# Altium PCB ESS-BoB.PcbDoc
Units mm, origin at the board's own origin, x right, y up, seen from the top; angles counter-clockwise.
Board outline 168.28 x 69.85 mm, 4 copper layers (Top, GND, PWR, Bottom), stack 1.584 mm thick; 101 components, 116 nets, 352 pads, 102 vias.
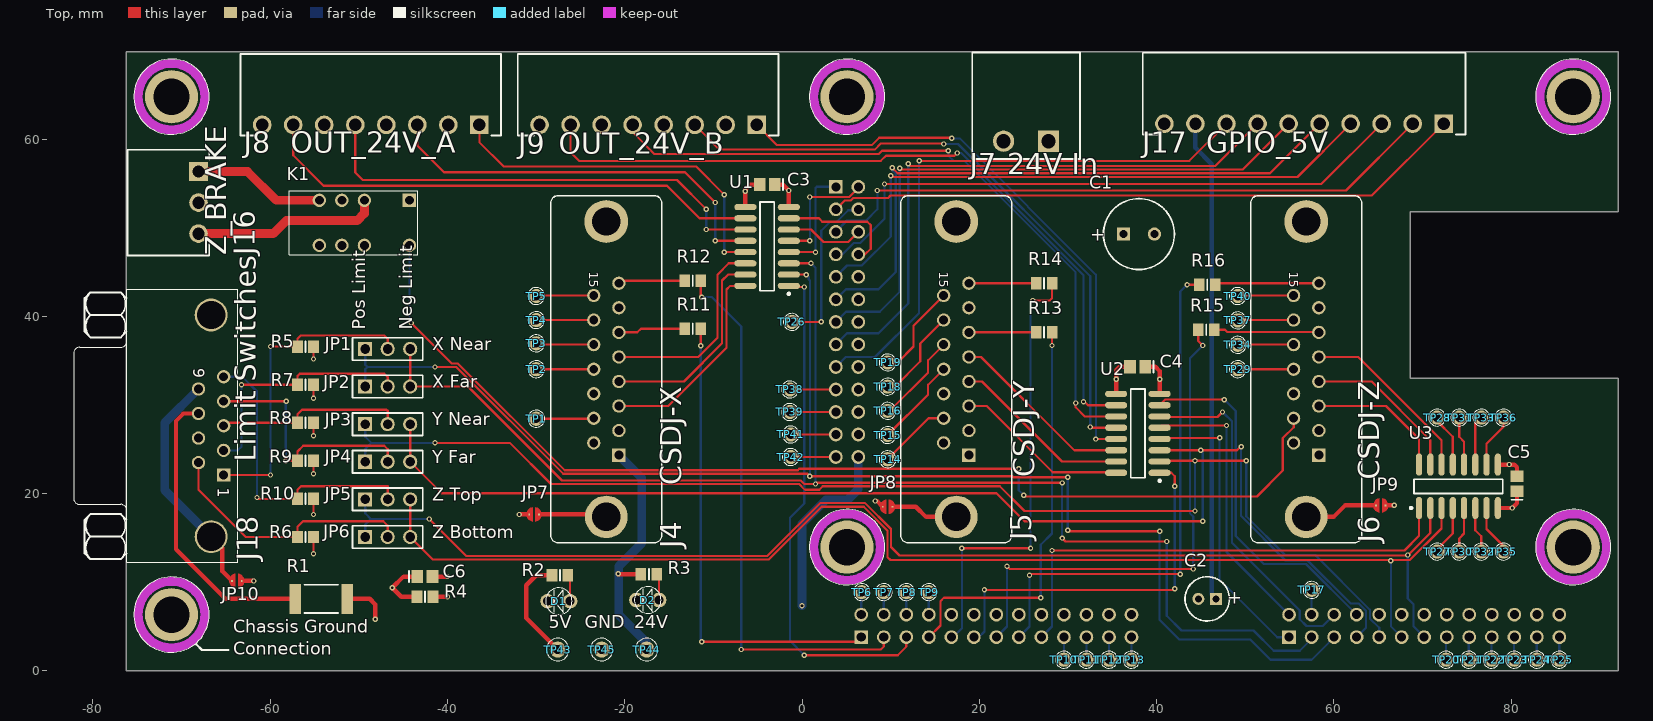
[diagram p0: Top view]
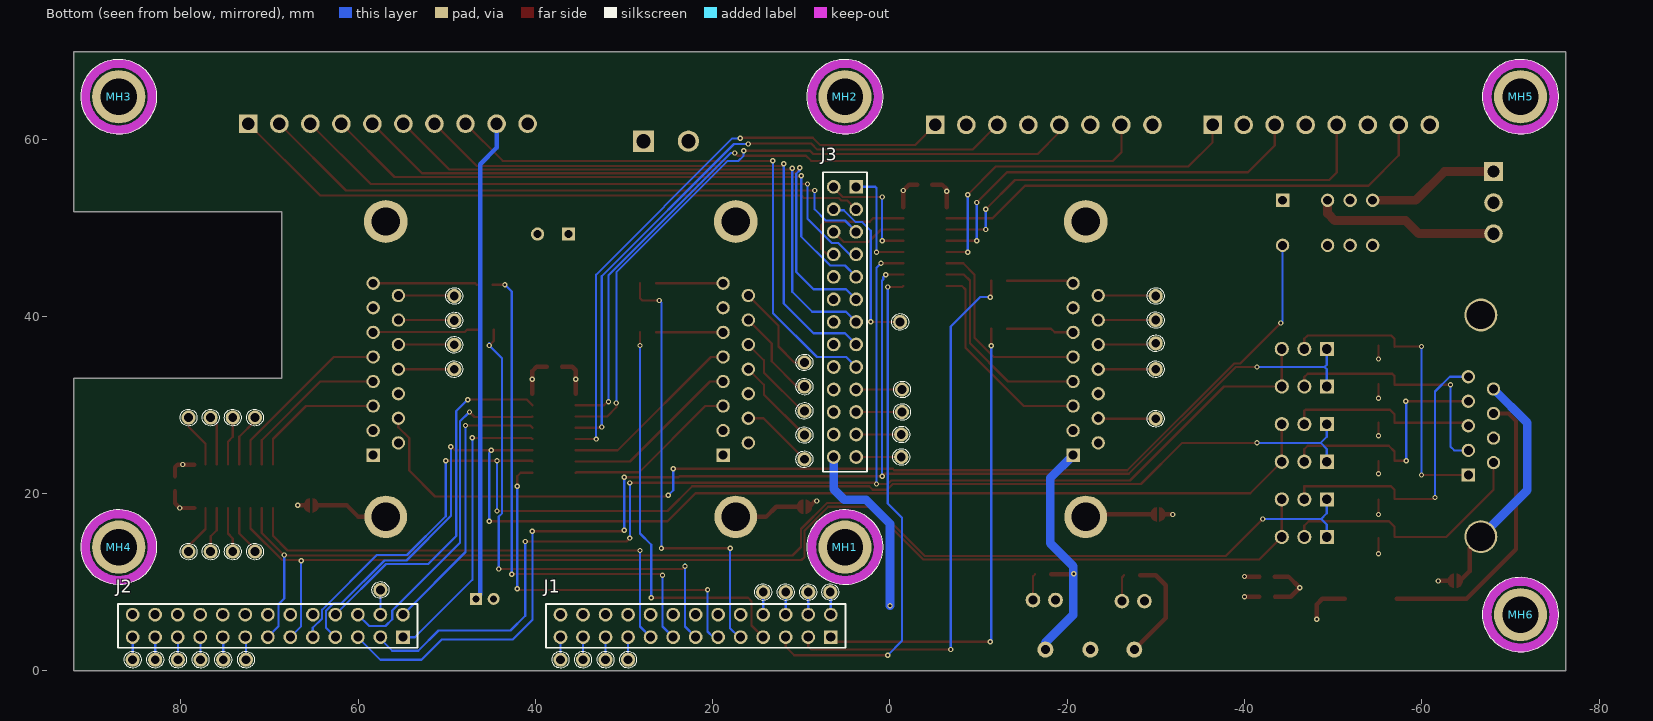
[diagram p1: Bottom view, seen from below]
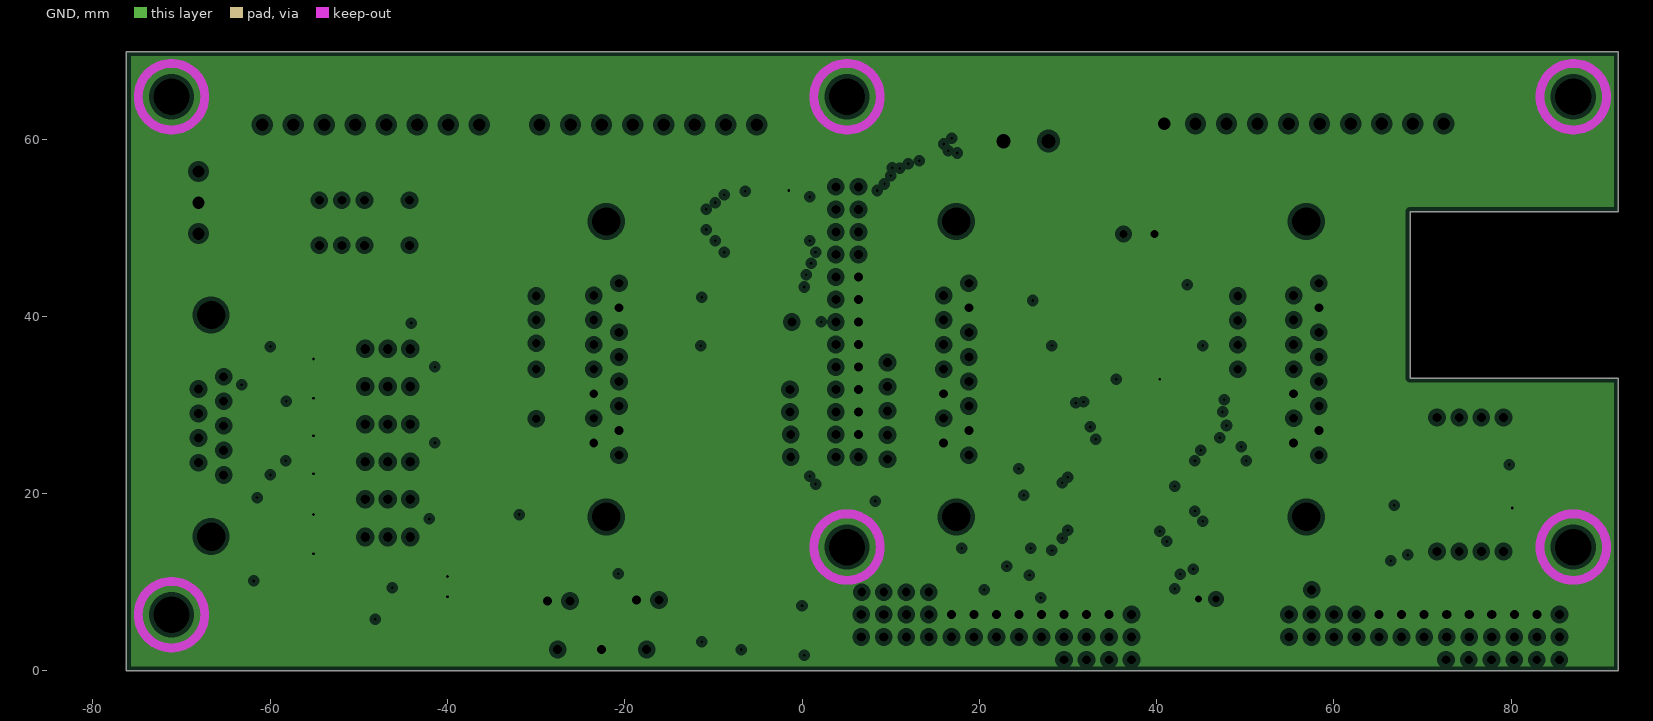
[diagram p2: GND, clearances drawn from the general rule]
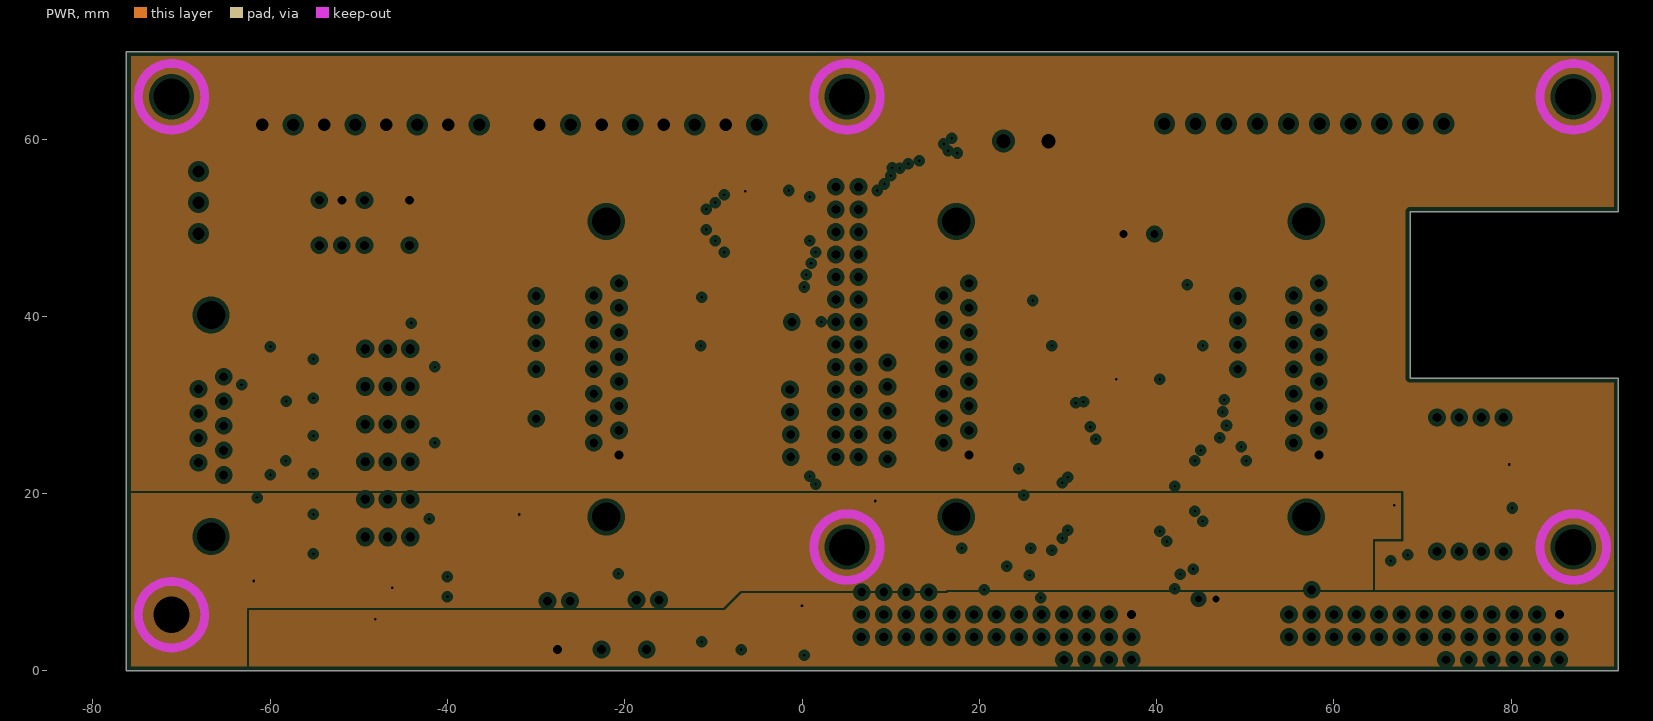
[diagram p3: PWR, clearances drawn from the general rule]
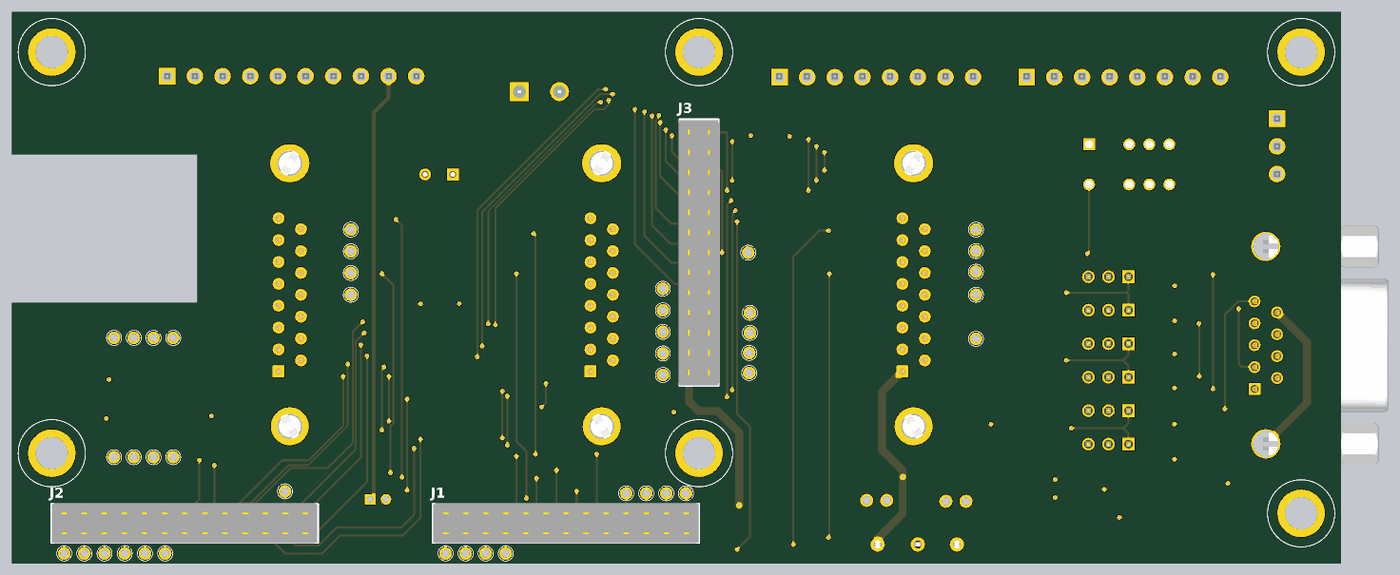
[diagram p4: 3D render of the assembled board from below, using the file's embedded part models]

## Layer stack, top to bottom
Top Solder: solder mask 0.01, Solder Resist, Dk 3.5
Top: signal copper 0.035
Prepreg: prepreg 0.18, Dk 4.2
GND: plane copper 0.017, net GND
Core: core 1.12, FR-4, Dk 4.2
PWR: plane copper 0.017, net 24V
Prepreg: prepreg 0.18, Dk 4.2
Bottom: signal copper 0.035
Solder Side: solder mask 0.01, Solder Resist, Dk 3.5

## Board outline
92.075,33.02 68.58,33.02 68.58,51.816 92.075,51.816 92.075,69.85 -76.2,69.85 -76.2,0 92.075,0

## Design rules (kind name [scope] priority, off if disabled: settings)
BoardOutlineClearance [not OnTopSilkscreen and not OnBottomSilkscreen] p1: gap=0.2 ignorepadtopadclearanceinfootprint=FALSE except(0: Arc-SplitContinuation Track-SplitContinuation SMDPad-SplitContinuation THPad-SplitContinuation Via-SplitContinuation Fill-SplitContinuation Poly-SplitContinuation Region-SplitContinuation Text-SplitContinuation)
Clearance Clearance_HV [InNetClass('HV_NETS')] p1: gap=0.4 ignorepadtopadclearanceinfootprint=TRUE
Clearance Clearance_Mounting_Hole_Chassis_GND [InComponent('MH6') vs InNet('CHASSIS_GND')] p2: gap=0 ignorepadtopadclearanceinfootprint=TRUE
Clearance "Stitching Via clearance" [IsStitchingVia vs (IsVia and (Not IsStitchingVia)) Or InAnyComponent] p3: gap=0.2 ignorepadtopadclearanceinfootprint=FALSE except(0: Arc-Hole Track-Hole SMDPad-Hole THPad-Hole Via-Hole Fill-Hole Poly-Hole Region-Hole Text-Hole)
Clearance [All] p4: gap=0.15 ignorepadtopadclearanceinfootprint=FALSE except(0: Arc-Hole Track-Hole SMDPad-Hole THPad-Hole Via-Hole Fill-Hole Poly-Hole Region-Hole Text-Hole; 0.2: Arc-Poly Track-Poly SMDPad-Poly THPad-Poly Via-Poly Fill-Poly Poly-Poly)
ComponentClearance ComponentClearance_NetTie [((ObjectKind = 'Component') And (ComponentType = 'Net Tie')) Or (Footprint = 'StarPoint') Or (Footprint like 'NetTieVia*')] p1: gap=-3.81 collisioncheckmode=3 verticalgap=-3.81 showdistances=FALSE
ComponentClearance [All] p2: gap=0.25 collisioncheckmode=3 verticalgap=0.254 showdistances=FALSE
DiffPairsRouting [All] p1: maxlimit=1 minlimit=0.15 mostfreqgap=0.25 toplayer_minwidth=0.15 toplayer_maxwidth=1 toplayer_prefwidth=0.2 bottomlayer_minwidth=0.15 bottomlayer_maxwidth=1 bottomlayer_prefwidth=0.2 maxuncoupledlength=20
FanoutControl Fanout_LCC [IsLCC] p2: bgadir=Out bgaviamode=Closest fanoutstyle=Rows fanoutdirection=OutOnly viagrid=0.025 // Fanout_LCC (Default Rule)
HoleSize [All] p1: absolutevalues=TRUE maxlimit=6 minlimit=0.3 maxpercent=80.000 minpercent=20.000
HoleToHoleClearance [All] p1: gap=0.2 allowstackedmicrovias=TRUE
PlaneClearance [All] p1: clearance=0.5
PlaneConnect PlaneConnect_stiching_vias [IsStitchingVia] p1: planeconnectstyle=Direct reliefexpansion=0.508 reliefentries=4 reliefconductorwidth=0.254 reliefairgap=0.254
PlaneConnect PlaneConnect_others [All] p2: planeconnectstyle=Direct reliefexpansion=0.508 reliefentries=4 reliefconductorwidth=0.254 reliefairgap=0.254
PolygonConnect [All] p1: connectstyle=Direct reliefconductorwidth=0.254 reliefentries=4 polygonreliefangle="90 Angle" airgapwidth=0.254
RoutingCorners [All] p1: cornerstyle=45-Degree minsetback=2.5 maxsetback=2.5
RoutingVias [All] p1: holewidth=0.3 width=0.6 viastyle="Through Hole" minholewidth=0.3 minwidth=0.6 maxholewidth=0.6 maxwidth=1.2
SilkToSolderMaskClearance [IsPad] p1: minsilkscreentomaskgap=0 clearancetoexposedcopper=TRUE
SolderMaskExpansion [All] p1: expansion=0.1
Width [All] p1: maxlimit=20 minlimit=0.2 preferedwidth=0.25
21 further rules are at their usual default settings.

## Classes and differential pairs
component class ESS-BoB: C1 C2 C3 C4 C5 C6 D1 D2 J1 J2 J3 J4 J5 J6 J7 J8 J9 J16 J17 J18 JP1 JP2 JP3 JP4 JP5 JP6 JP7 JP8 JP9 JP10 K1 R1 R2 R3 R4 R5 R6 R7 R8 R9 R10 R11 R12 R13 R14 R15 R16 TP1 TP2 TP3 TP4 TP5 TP6 TP7 TP8 TP9 TP10 TP11 TP12 TP13 TP14 TP15 TP16 TP17 TP18 TP19 TP20 TP21 TP22 TP23 TP24 TP25 TP26 TP27 TP28 TP29 TP30 TP31 TP32 TP33 TP34 TP35 TP36 TP37 TP38 TP39 TP40 TP41 TP42 TP43 TP44 TP45 U1 U2 U3

## Components (designator, comment, footprint, x,y, rotation, side; value= is the part's Value field where it differs from the comment)
C1 "Cap Polarized" CAPPR3.5-8x12 38.001,49.276 r0 top value=100uF
C2 "Cap Polarized" CAPPR2-5x11 45.704,8.128 r180 top value=100uF
C3 "Cap non-polarized" CAPC2012N -3.937,54.864 r180 top value=0.1uF
C4 "Cap non-polarized" CAPC2012N 37.846,34.302 r180 top value=0.1uF
C5 "Cap non-polarized" CAPC2012N 80.645,21.121 r90 top value=0.1uF
C6 "Cap non-polarized" CAPC2012N -42.53,10.648 r0 top value=10nF
D1 "5V" LED-3MM-RED -26.162,7.874 r180 top
D2 "24V" LED-3MM-RED -16.129,8.001 r180 top
J1 "ESS Header 1" "Samtec ESQ-113-33-G-D" 21.92,5.08 r0 bottom locked
J2 "ESS Header 2" "Samtec ESQ-113-33-G-D" 70.18,5.08 r0 bottom locked
J3 "ESS Header 3" "Samtec ESQ-113-33-G-D" 5.08,39.37 r270 bottom locked
J4 "CSDJ-X" "D-SUB-15 FEMALE TH STRAIGHT" -22.075,34.036 r270 top
J5 "CSDJ-Y" "D-SUB-15 FEMALE TH STRAIGHT" 17.399,34.036 r270 top
J6 "CSDJ-Z" "D-SUB-15 FEMALE TH STRAIGHT" 56.873,34.036 r270 top
J7 "24V In" "Modular Screw Terminals 5.08mm 2p RA TH" 25.273,63.754 r180 top
J8 "OUT_24V_A" "Modular Screw Terminals 3.5mm 8p RA TH MOLEX" -48.641,64.995 r180 top
J9 "OUT_24V_B" "Modular Screw Terminals 3.5mm 8p RA TH MOLEX" -17.356,64.995 r180 top
J16 "Z_BRAKE" "Modular Screw Terminals 3.5mm 3p RA TH MOLEX" -68.072,52.832 r270 top
J17 "GPIO_5V" "Modular Screw Terminals 3.5mm 10p RA TH MOLEX" 56.629,61.722 r180 top
J18 "Limit Switches" "D-SUB-9 FEMALE TH RA" -66.652,27.65 r270 top
JP1 "X Near" "Header 2.54mm 3p TH Vertical" -46.736,36.322 r0 top
JP2 "X Far" "Header 2.54mm 3p TH Vertical" -46.736,32.08 r0 top
JP3 "Y Near" "Header 2.54mm 3p TH Vertical" -46.736,27.838 r0 top
JP4 "Y Far" "Header 2.54mm 3p TH Vertical" -46.736,23.597 r0 top
JP5 "Z Top" "Header 2.54mm 3p TH Vertical" -46.736,19.355 r0 top
JP6 "Z Bottom" "Header 2.54mm 3p TH Vertical" -46.736,15.113 r0 top
JP7 "Solder Jumper NO" "SOLDER JUMPER NO 1.6mm" -30.226,17.653 r270 top
JP8 "Solder Jumper NO" "SOLDER JUMPER NO 1.6mm" 9.652,18.528 r270 top
JP9 "Solder Jumper NO" "SOLDER JUMPER NO 1.6mm" 65.278,18.669 r90 top
JP10 "Solder Jumper NO" "SOLDER JUMPER NO 1.6mm" -63.754,10.16 r270 top
K1 "V23079A1001B301 _1393788-3_" TE_RELAY_V23079_TH -44.281,53.086 r180 top
MH1 "Mounting Hole, 4.0mm" "HOLE M4" 5.08,13.97 r180 bottom locked
MH2 "Mounting Hole, 4.0mm" "HOLE M4" 5.08,64.77 r180 bottom locked
MH3 "Mounting Hole, 4.0mm" "HOLE M4" 86.995,64.77 r180 bottom locked
MH4 "Mounting Hole, 4.0mm" "HOLE M4" 86.995,13.97 r180 bottom locked
MH5 "Mounting Hole, 4.0mm" "HOLE M4" -71.12,64.77 r180 bottom
MH6 "Mounting Hole, 4.0mm" "HOLE M4" -71.12,6.35 r180 bottom
R1 "Resistor" RESC6332N -54.229,8.128 r0 top value=47
R2 "Resistor" RESC2012N -27.305,10.795 r180 top value=680
R3 "Resistor" RESC2012N -17.272,10.922 r180 top value=4.7k
R4 "Resistor" RESC2012N -42.53,8.362 r180 top value=1M
R5 "Resistor" RESC2012N -56.007,36.576 r180 top value=4.7k
R6 "Resistor" RESC2012N -56.007,15.113 r180 top value=4.7k
R7 "Resistor" RESC2012N -56.007,32.283 r180 top value=4.7k
R8 "Resistor" RESC2012N -56.007,27.991 r180 top value=4.7k
R9 "Resistor" RESC2012N -56.007,23.698 r180 top value=4.7k
R10 "Resistor" RESC2012N -56.007,19.406 r180 top value=4.7k
R11 "Resistor" RESC2012N -12.319,38.608 r180 top value=220
R12 "Resistor" RESC2012N -12.319,44 r180 top value=220
R13 "Resistor" RESC2012N 27.305,38.191 r180 top value=220
R14 "Resistor" RESC2012N 27.305,43.731 r180 top value=220
R15 "Resistor" RESC2012N 45.593,38.481 r0 top value=220
R16 "Resistor" RESC2012N 45.72,43.561 r0 top value=220
TP1 "" "TEST PAD TH" -29.972,28.448 r180 top
TP2 "" "TEST PAD TH" -29.972,34.036 r180 top
TP3 "" "TEST PAD TH" -29.972,36.957 r180 top
TP4 "" "TEST PAD TH" -29.972,39.576 r180 top
TP5 "" "TEST PAD TH" -29.972,42.291 r180 top
TP6 "" "TEST PAD TH" 6.731,8.89 r180 top
TP7 "" "TEST PAD TH" 9.22,8.89 r180 top
TP8 "" "TEST PAD TH" 11.76,8.89 r180 top
TP9 "" "TEST PAD TH" 14.3,8.89 r180 top
TP10 "" "TEST PAD TH" 29.54,1.27 r0 top
TP11 "" "TEST PAD TH" 32.08,1.27 r0 top
TP12 "" "TEST PAD TH" 34.62,1.27 r0 top
TP13 "" "TEST PAD TH" 37.16,1.27 r0 top
TP14 "" "TEST PAD TH" 9.652,23.876 r180 top
TP15 "" "TEST PAD TH" 9.652,26.607 r180 top
TP16 "" "TEST PAD TH" 9.652,29.337 r180 top
TP17 "" "TEST PAD TH" 57.48,9.144 r180 top
TP18 "" "TEST PAD TH" 9.652,32.067 r180 top
TP19 "" "TEST PAD TH" 9.652,34.798 r180 top
TP20 "" "TEST PAD TH" 72.644,1.27 r0 top
TP21 "" "TEST PAD TH" 75.203,1.27 r0 top
TP22 "" "TEST PAD TH" 77.762,1.27 r0 top
TP23 "" "TEST PAD TH" 80.321,1.27 r0 top
TP24 "" "TEST PAD TH" 82.88,1.27 r180 top
TP25 "" "TEST PAD TH" 85.42,1.27 r180 top
TP26 "" "TEST PAD TH" -1.143,39.37 r180 top
TP27 "" "TEST PAD TH" 71.628,13.462 r180 top
TP28 "" "TEST PAD TH" 71.628,28.575 r180 top
TP29 "" "TEST PAD TH" 49.149,34.036 r180 top
TP30 "" "TEST PAD TH" 74.126,13.462 r180 top
TP31 "" "TEST PAD TH" 74.126,28.575 r180 top
TP32 "" "TEST PAD TH" 76.623,13.462 r180 top
TP33 "" "TEST PAD TH" 76.623,28.575 r180 top
TP34 "" "TEST PAD TH" 49.149,36.788 r180 top
TP35 "" "TEST PAD TH" 79.121,13.462 r180 top
TP36 "" "TEST PAD TH" 79.121,28.575 r180 top
TP37 "" "TEST PAD TH" 49.149,39.539 r180 top
TP38 "" "TEST PAD TH" -1.36,31.75 r180 top
TP39 "" "TEST PAD TH" -1.36,29.21 r180 top
TP40 "" "TEST PAD TH" 49.149,42.291 r180 top
TP41 "" "TEST PAD TH" -1.27,26.67 r180 top
TP42 "" "TEST PAD TH" -1.27,24.13 r180 top
TP43 "5V" "TP_LOOP_1MM - WHITE" -27.559,2.413 r180 top
TP44 "24V" "TP_LOOP_1MM - WHITE" -17.526,2.413 r180 top
TP45 "GND" "TP_LOOP_1MM - BLACK" -22.606,2.413 r180 top
U1 "TPL7407LA" "TI D016_M (SOIC16)" -3.937,47.879 r180 top
U2 "TPL7407LA" "TI D016_M (SOIC16)" 37.883,26.797 r180 top
U3 "TPL7407LA" "TI D016_M (SOIC16)" 74.041,20.828 r90 top

## Footprints (in the part's own frame and the unit in brackets; to place one, negate y for a bottom-side part, rotate by r counter-clockwise, add the part's x,y. Pads: shape width x height; smd on the part's side, far side on the other; paste and mask are expansions set on the pad)
CAPC2012N [mm] "Chip Capacitor, Body 2.0x1.3mm, IPC Medium Density"
  rect 1.3x1.5 smd: 1(-0.85,0) 2(0.85,0)
  silkscreen extent -1.8,-0.65 -1.8,0.65, body extent -1.1,-0.72 1.1,0.72, height 1.1
CAPPR2-5x11 [mm] "Capacitor, Electrolytic, Radial; Body 5 x 11 mm (Dia.xH typ); Pin Spacing 2 mm (typ)"
  rect 1.35x1.35 hole 0.8: 1(-1,0)
  round 1.35 hole 0.8: 2(1,0)
  silkscreen extent -2.5,-2.5 2.5,2.5, body extent -2.5,-2.5 2.5,2.5, height 11
CAPPR3.5-8x12 [mm] "Capacitor, Electrolytic, Radial; Body 8 x 12 mm (Dia.xH typ); Pin Spacing 3.5 mm (typ)"
  rect 1.5x1.5 hole 0.9: 1(-1.75,0)
  round 1.5 hole 0.9: 2(1.75,0)
  silkscreen extent -4,-4 4,4, body extent -4,-4 4,4, height 12
"D-SUB-9 FEMALE TH RA" [mm] "Wurth 618009231121 - 9 pins, right angled, 8.08mm, with hex screw"
  rect 1.5x1.5 hole 1: 1(5.54,1.42)
  round 1.5 hole 1: 2(2.77,1.42) 3(0,1.42) 4(-2.77,1.42) 5(-5.54,1.42) 6(4.155,-1.42) 7(1.385,-1.42) 8(-1.385,-1.42) 9(-4.155,-1.42)
  round 3.7 hole 3.2: Z1(-12.5,0) Z2(12.5,0)
  silkscreen extent -15.4,-15.5 15.4,3, body extent -15.4,-15.5 15.4,3, height 12.51
"D-SUB-15 FEMALE TH STRAIGHT" [mm] "Wurth 61801529321 - Female 15p Straight With board clip & Hex screw UNC 4-40"
  rect 1.5x1.5 hole 1: 1(9.695,1.42)
  round 1.5 hole 1: 2(6.925,1.42) 3(4.155,1.42) 4(1.385,1.42) 5(-1.385,1.42) 6(-4.155,1.42) 7(-6.925,1.42) 8(-9.695,1.42) 9(8.31,-1.42) 10(5.54,-1.42) 11(2.77,-1.42) 12(0,-1.42) 13(-2.77,-1.42) 14(-5.54,-1.42) 15(-8.31,-1.42)
  oval 4.8x4.95 hole 3.2: M1(-16.66,0)
  round 4.8 hole 3.2: M2(16.66,0)
  silkscreen extent -19.57,-6.25 19.57,6.25, body extent -19.57,-6.25 19.57,6.25, height 12.9
"Header 2.54mm 3p TH Vertical" [mm] "Pin Header, pitch 2.54 mm, THT, Vertical, single row, 3p"
  rect 1.6x1.6 hole 1.1: 1(-2.54,0)
  round 1.6 hole 1.1: 2(0,0) 3(2.54,0)
  silkscreen extent -3.96,-1.27 3.96,1.27, body extent -3.81,-1.27 3.81,1.27, height 8.57
"HOLE M4" [mm] "M4 mounting hole, 8.5mm keepout"
  round 6 hole 4.1: 1(0,0)
  Keep-Out Layer circle w1: c0,0 r3.75
  silkscreen extent -4.25,-4.25 4.25,4.25
LED-3MM-RED [mil]
  round 65 hole 40: A(0,0) K(100,0)
  silkscreen extent -9,-59 109,59, body extent -15,-63 114,67, height 250
"Modular Screw Terminals 3.5mm 3p RA TH MOLEX" [mm] "Horizontal PCB Header, pitch 3.5mm, 3p"
  rect 2.1x2.1 hole 1.4: 1(-3.5,0)
  round 2.1 hole 1.4: 2(0,0) 3(3.5,0)
  silkscreen extent -5.95,-8 5.97,1.2, body extent -5.96,-7.87 5.96,1.27, height 6.86
"Modular Screw Terminals 3.5mm 8p RA TH MOLEX" [mm] "Horizontal PCB Header, pitch 3.5mm, 08p"
  rect 2.1x2.1 hole 1.4: 1(-12.25,3.4)
  round 2.1 hole 1.4: 2(-8.75,3.4) 3(-5.25,3.4) 4(-1.75,3.4) 5(1.75,3.4) 6(5.25,3.4) 7(8.75,3.4) 8(12.25,3.4)
  silkscreen extent -14.7,-4.6 14.7,4.6, body extent -14.69,-4.57 14.69,4.57, height 6.86
"Modular Screw Terminals 3.5mm 10p RA TH MOLEX" [mm] "Horizontal PCB Header, pitch 3.5mm, 10p"
  rect 2.1x2.1 hole 1.4: 1(-15.75,0)
  round 2.1 hole 1.4: 2(-12.25,0) 3(-8.75,0) 4(-5.25,0) 5(-1.75,0) 6(1.75,0) 7(5.25,0) 8(8.75,0) 9(12.25,0) 10(15.75,0)
  silkscreen extent -18.2,-8 18.2,1.2, body extent -18.23,-7.88 18.25,1.27, height 6.86
"Modular Screw Terminals 5.08mm 2p RA TH" [mm] "Wurth 691313510002 - 5,08mm - PCB Headers - Horizontal - Closed ends - 02p"
  rect 2.4x2.4 hole 1.6: 1(-2.54,4)
  round 2.4 hole 1.6: 2(2.54,4)
  silkscreen extent -6.08,-6 6.08,6, body extent -6.08,-6 6.08,6, height 8.55
RESC2012N [mm] "Chip Resistor, Body 2.0x1.3mm, IPC Medium Density"
  rect 1.2x1.4 smd: 1(-0.9,0) 2(0.9,0)
  silkscreen extent 0,-0.6 0,0.6, body extent -1.07,-0.7 1.07,0.7, height 0.65
RESC6332N [mm] "Chip Resistor, Body 6.3x3.2mm, IPC Medium Density"
  rect 1.3x3.4 smd: 1(-2.95,0) 2(2.95,0)
  silkscreen extent -1.9,-1.6 1.9,1.6, body extent -3.22,-1.68 3.22,1.68, height 0.71
"Samtec ESQ-113-33-G-D" [mm] "Samtec female header, 2x13pin, extra tall"
  rect 1.55x1.55 hole 1.02: 1(-15.24,1.27)
  round 1.55 hole 1.02: 2(-12.7,1.27) 3(-10.16,1.27) 4(-7.62,1.27) 5(-5.08,1.27) 6(-2.54,1.27) 7(0,1.27) 8(2.54,1.27) 9(5.08,1.27) 10(7.62,1.27) 11(10.16,1.27) 12(12.7,1.27) 13(15.24,1.27) 14(-15.24,-1.27) 15(-12.7,-1.27) 16(-10.16,-1.27) 17(-7.62,-1.27) 18(-5.08,-1.27) 19(-2.54,-1.27) 20(0,-1.27) 21(2.54,-1.27) 22(5.08,-1.27) 23(7.62,-1.27) 24(10.16,-1.27) 25(12.7,-1.27) 26(15.24,-1.27)
  silkscreen extent -16.89,-2.47 16.89,2.47, body extent -16.78,-2.56 16.75,2.52, height 16.13
"SOLDER JUMPER NO 1.6mm" [mm] "minimal solder paste so it isn't shorted by default"
  rect 0.2x0.2 smd: 1(0,-0.55) 2(0,0.55)
  Top region: -0.801,0.15 0.799,0.15 0.674,0.51 0.385,0.76 0.01,0.831 0.01,0.831 -0.371,0.764 -0.668,0.514 -0.801,0.15
  Top region: -0.801,-0.15 0.799,-0.15 0.674,-0.51 0.385,-0.76 0.01,-0.831 0.01,-0.831 -0.371,-0.764 -0.668,-0.514 -0.801,-0.15
TE_RELAY_V23079_TH [mm] "TE Connectivity Axicom series relay, TH"
  rect 1.508x1.508 hole 1: 1(0,0)
  round 1.508 hole 1: 3(5.08,0) 4(7.62,0) 5(10.16,0) 8(10.16,5.08) 9(7.62,5.08) 10(5.08,5.08) 12(0,5.08)
  silkscreen extent -0.95,-1.06 13.55,6.14, body extent -0.95,-1.05 13.55,6.15, height 9.8
"TEST PAD TH" [mm] "Test Pad - Through Hole"
  round 1.6 hole 1: 1(0,0)
  silkscreen extent -0.95,-0.95 0.95,0.95
"TI D016_M (SOIC16)" [mm] "SOIC, 16-Leads, Body 9.9x3.9mm, Pitch 1.27mm, IPC Low Density"
  oval 2.5x0.7 smd: 1(-2.45,4.445) 2(-2.45,3.175) 3(-2.45,1.905) 4(-2.45,0.635) 5(-2.45,-0.635) 6(-2.45,-1.905) 7(-2.45,-3.175) 8(-2.45,-4.445) 9(2.45,-4.445) 10(2.45,-3.175) 11(2.45,-1.905) 12(2.45,-0.635) 13(2.45,0.635) 14(2.45,1.905) 15(2.45,3.175) 16(2.45,4.445)
  silkscreen extent -2.58,-5 0.8,5.47, body extent -3.08,-5.02 3,4.98, height 1.65
"TP_LOOP_1MM - BLACK" [mm] "for wire-loop style with plastic base. 1.0mm hole."
  round 1.8 hole 1: 1(0,0)
  silkscreen extent -1.27,-1.27 1.27,1.27, body extent -1.27,-1.27 1.27,1.27, height 4.57
"TP_LOOP_1MM - WHITE" [mm] "for wire-loop style with plastic base. 1.0mm hole."
  round 1.8 hole 1: 1(0,0)
  silkscreen extent -1.27,-1.27 1.27,1.27, body extent -1.27,-1.27 1.27,1.27, height 4.57

## Part data
C1: "Polarized Capacitor", Tolerance="TBD %", Voltage Rating=50V, ESR="TBD mOhm"
C2: "Polarized Capacitor", Tolerance="TBD %", Voltage Rating=25V, ESR="TBD mOhm"
C3 C4 C5 C6: "Capacitor, non-polarized", Tolerance="TBD %", Voltage Rating="TBD V", ESR="TBD mOhm"
D1 D2: library part LED
J1 J2 J3: library part "CON2x13 Alt. Numbering", Current Rating="5.7A per Contact", Insulation Color=Black, Manufacturer 1="Samtec Inc.", Manufacturer Part Number 1=ESQ-113-33-G-D, Material Flammability Rating="UL94 V-0", Operating Temperature="-55°C ~ 125°C", Supplier Part Number 1=SAM11103-ND, Voltage Rating=550VAC, Applications=-, Category 1="Connectors, Interconnects", ComponentLink1Description=http://suddendocs.samtec.com/prints/esq-1xx-xx-x-x-xxx-xx-x-xx-mkt.pdf, ComponentLink1URL=http://suddendocs.samtec.com/prints/esq-1xx-xx-x-x-xxx-xx-x-xx-mkt.pdf, Connector Type="Elevated Socket", Contact Finish - Mating=Gold, Contact Finish - Post=Gold, Contact Finish Thickness - Mating="20.0µin (0.51µm)", Contact Finish Thickness - Post="3.00µin (0.076µm)", Contact Length - Post="0.090\" (2.29mm)", Contact Material="Phosphor Bronze", Contact Shape=Square, Contact Type=Forked, Description 1="ELEVATED SOCKET STRIPS", Fastening Type=Push-Pull, Features=-, Ingress Protection=-, Insulation Height="0.635\" (16.13mm)", Insulation Material="Liquid Crystal Polymer (LCP)", Mated Stacking Heights=-, Mounting Type="Through Hole", Number of Positions=26, Number of Positions Loaded=All, Packaging=Tube, Part Status=Active, Pitch - Mating="0.100\" (2.54mm)", Pricing 1="1=6.24, 10=5.28, 100=4.08, 500=3.36, 1000=3.12 (USD)", RoHS 1="RoHS Compliant", Row Spacing - Mating="0.100\" (2.54mm)", Style="Board to Board", Supplier 1=Digi-Key, Termination=Solder
J4 J5 J6: library part "D-Sub-15 Wurth 618015231121", "WR-DSUB Female Angled PCB Connector"
J7: library part CON2
J8 J9: library part CON8
J16: library part CON3
J17: library part CON10
J18: library part "D-Sub-9 Wurth 618009231121", "WR-DSUB Female Angled PCB Connector"
JP1 JP2 JP3 JP4 JP5 JP6: library part "Jumper Header SPDT", "Jumper Header - SPDT"
K1: library part "RELAY_TE_ V23079", "V23079A1001B301", Contact_Switching_Voltage_Max="250 VAC", Package="DIP-8 TE Connectivity", Availability=Good, MF="TE Connectivity", MP=1393788-3, Price="1.94 USD", Product_Type=Relay, Relay_Type="P2 Relay V23079", SnapEDA_Link=https://www.snapeda.com/parts/1393788-3/TE%2520Connectivity/view-part/?ref=snap
R1: Manufacturer 1="Bourns Inc.", Manufacturer Part Number 1=CRM2512-JW-470ELF, Operating Temperature="-55°C ~ 155°C", Package / Case="2512 (6432 Metric)", Power (Watts)=2W, Supplier Device Package=2512, Supplier Part Number 1=CRM2512-JW-470ELFCT-ND, Temperature Coefficient=±200ppm/°C, Category 1=Resistors, ComponentLink1Description=https://www.bourns.com/docs/Product-Datasheets/CRM.pdf, ComponentLink1URL=https://www.bourns.com/docs/Product-Datasheets/CRM.pdf, Composition="Thick Film", Description 1="RES SMD 47 OHM 5% 2W 2512", Failure Rate=-, Features="Current Sense", Height - Seated (Max)="0.032\" (0.80mm)", Packaging="Cut Tape (CT)", Part Status=Active, Pricing 1="1=0.39, 10=0.301, 25=0.2292, 50=0.1702, 100=0.1266, 250=0.10696, 500=0.09168, 1000=0.06985 (USD)", RoHS 1="RoHS Compliant", Size / Dimension="0.248\" L x 0.122\" W (6.30mm x 3.10mm)", Supplier 1=Digi-Key
R2 R3 R4 R11 R12 R13 R14 R15 R16: Power Rating="TBD W", Tolerance=TBD%
TP1 TP2 TP3 TP4 TP5 TP6 TP7 TP8 TP9 TP10 TP11 TP12 TP13 TP14 TP15 TP16 TP17 TP18 TP19 TP20 TP21 TP22 TP23 TP24 TP25 TP26 TP27 TP28 TP29 TP30 TP31 TP32 TP33 TP34 TP35 TP36 TP37 TP38 TP39 TP40 TP41 TP42 TP43 TP44 TP45: library part TEST_POINT
U1 U2 U3: library part TPL7407L, "Solenoid Driver"

## Via types
v1: diameter 0.6, hole 0.3, Top to Bottom, 102 vias

## Nets (pads, with @x,y where several pads share a name; then routed paths per layer and width w, separated by ;. In a path a pad name is that pad's centre, name@x,y a point inside that pad or via, vN(x,y) a via of type N, cw(c..) or ccw(c..) an arc to the next point about the centre after c; other vN are vias at no path point)
5V: C2.1 J1.26 J2.26 J3.26 J17.9 R1.2 R2.2 TP43.1 | length 92.5
  Top w0.5: R1.2 -48.768,8.128 -48.133,7.493 v1(-48.133,5.842) ; R2.2 -29.972,10.795 -31.115,9.652 -31.115,5.969 TP43.1
  Bottom w0.5: J17.9 44.379,58.999 46.228,57.15 46.228,16.831 46.228,8.604 C2.1
  Bottom w1: v1(0,7.366) 0,16.6 2.704,19.304 5.14,19.304 6.35,20.514 J3.26
24V: C1.1 C3.2 C4.2 C5.2 J4.1 J5.1 J6.1 J7.1 J8.2 J8.4 J8.6 J8.8 J9.2 J9.4 J9.6 J9.8 K1.1 K1.4 R3.2 TP44.1 U1.9 U2.9 U3.9 | length 39.5
  Top w0.5: v1(-20.725,10.95) -20.697,10.922 R3.2 ; U1.9 -6.387,54.338 -5.861,54.864 C3.2 ; U2.9 35.433,33.902 35.833,34.302 C4.2 ; U3.9 80.354,23.278 80.645,22.987 C5.2
  Bottom w1: J4.1 -18.075,21.761 -18.075,14.4 -20.675,11.8 -20.675,6.325 -17.526,3.176 TP44.1
  other v1: 79.756,23.278 35.433,32.893 -6.387,54.102
\X_SV_ON: J4.3 U1.16 | length 23.7
  Top w0.25: J4.3 -15.077,29.881 -8.509,36.449 -8.509,43.023 -8.098,43.434 U1.16
\Y_SV_ON: J5.3 U2.16 | length 19.7
  Top w0.25: J5.3 20.828,29.881 28.29,22.419 35.366,22.419 U2.16
\Z_SV_ON: J6.3 U3.16 | length 15.7
  Top w0.25: J6.3 65.877,29.881 69.596,26.162 U3.16
AUX_IO_1_5V: J3.2 J17.1 | length 72.6
  Top w0.25: J3.2 4.807,53.067 5.5,53.067 5.773,53.34 9.715,53.34 9.992,53.617 64.274,53.617 J17.1
AUX_IO_2_5V: J3.3 J17.2 | length 71.4
  Top w0.25: v1(8.5,54.192) 61.349,54.192 J17.2
  Bottom w0.25: J3.3 5.08,50.8 7.239,50.8 8.5,52.061 v1(8.5,54.192)
AUX_IO_3_5V: J3.4 J17.3 | length 70
  Top w0.25: v1(9.3,54.925) 58.582,54.925 J17.3
  Bottom w0.25: J3.4 4.572,46.99 5.842,48.26 6.565,48.26 9.3,50.995 v1(9.3,54.925)
AUX_IO_4_5V: J3.5 J17.4 | length 69.3
  Top w0.25: v1(10,55.85) 10.125,55.725 55.882,55.725 J17.4
  Bottom w0.25: J3.5 5.08,45.72 6.731,45.72 10,48.989 v1(10,55.85)
AUX_IO_5_5V: J3.6 J17.5 | length 70.8
  Top w0.25: v1(10.162,56.75) 10.787,56.125 52.782,56.125 J17.5
  Bottom w0.25: J3.6 4.953,43.053 8.636,43.053 10.575,44.992 10.575,56.088 10.162,56.501 v1(10.162,56.75)
AUX_IO_6_5V: J3.7 J17.6 | length 68.6
  Top w0.25: v1(11.025,56.7) 11.169,56.556 49.713,56.556 J17.6
  Bottom w0.25: J3.7 4.953,40.513 8.763,40.513 11.025,42.775 v1(11.025,56.7)
AUX_IO_7_5V: J3.8 J17.7 | length 67.3
  Top w0.25: v1(11.975,57.2) 12.219,56.956 46.613,56.956 J17.7
  Bottom w0.25: J3.8 5.08,38.1 8.636,38.1 11.975,41.439 v1(11.975,57.2)
AUX_IO_8_5V: J3.9 J17.8 | length 65.5
  Top w0.25: v1(13.208,57.531) 43.688,57.531 J17.8
  Bottom w0.25: J3.9 4.941,35.421 8.243,35.421 13.208,40.386 v1(13.208,57.531)
AUX_OUT_1_5V: J3.1 U1.4 | length 12.6
  Top w0.25: U1.4 v1(1.524,47.244)
  Bottom w0.25: v1(1.524,47.244) 1.524,54.483 1.651,54.61 J3.1
AUX_OUT_1_24V: J8.1 U1.13 | length 40.9
  Top w0.25: J8.1 -36.391,59.632 -33.655,56.896 -11.938,56.896 v1(-8.763,53.721) ; v1(-8.763,47.244) U1.13
  Bottom w0.25: v1(-8.763,47.244) v1(-8.763,53.721)
AUX_OUT_2_5V: J3.14 U1.5 | length 13.3
  Top w0.25: U1.5 v1(0.889,48.514) ; v1(0.889,53.467) 5.334,53.467 6.35,54.483 J3.14
  Bottom w0.25: v1(0.889,48.514) v1(0.889,53.467)
AUX_OUT_2_24V: J8.3 U1.12 | length 46.3
  Top w0.25: J8.3 -43.391,59.266 -40.386,56.261 -13.208,56.261 v1(-9.779,52.832) ; v1(-9.779,48.514) U1.12
  Bottom w0.25: v1(-9.779,48.514) v1(-9.779,52.832)
AUX_OUT_3_5V: J3.16 U1.6 | length 8.9
  Top w0.25: U1.6 1.016,49.784 2.413,48.387 5.207,48.387 J3.16
AUX_OUT_3_24V: J8.5 U1.11 | length 53.4
  Top w0.25: J8.5 -50.391,56.233 -49.53,55.372 -14.097,55.372 v1(-10.795,52.07) ; v1(-10.795,49.784) U1.11
  Bottom w0.25: v1(-10.795,49.784) v1(-10.795,52.07)
AUX_OUT_4_5V: J3.17 U1.7 | length 13.9
  Top w0.25: U1.7 1.905,51.054 2.286,50.673 7.366,50.673 7.747,50.292 7.747,47.625 7.112,46.99 J3.17
AUX_OUT_4_24V: J8.7 U1.10 | length 57.4
  Top w0.25: J8.7 -57.391,58.164 -53.964,54.737 -15.24,54.737 -11.557,51.054 U1.10
AUX_OUT_5_5V: J2.1 U2.4 | length 33.3
  Top w0.25: U2.4 40.46,26.289 v1(47.106,26.289)
  Bottom w0.25: v1(47.106,26.289) 47.106,10.298 53.594,3.81 J2.1
AUX_OUT_5_24V: J9.1 U2.13 | length 66.8
  Top w0.25: J9.1 -2.82,59.309 7.874,59.309 8.703,60.138 16.824,60.138 v1(16.891,60.071) ; v1(33.147,26.153) 35.424,26.153 U2.13
  Bottom w0.25: v1(16.891,60.071) 17.78,60.071 33.147,44.704 v1(33.147,26.153)
AUX_OUT_6_5V: J2.14 U2.5 | length 31.9
  Top w0.25: U2.5 40.587,27.686 v1(47.879,27.686)
  Bottom w0.25: v1(47.879,27.686) 47.879,13.411 J2.14
AUX_OUT_6_24V: J9.3 U2.12 | length 72.3
  Top w0.25: J9.3 -9.312,58.801 8.191,58.801 8.893,59.503 15.935,59.503 v1(16.002,59.436) ; v1(32.512,27.523) 32.512,27.432 U2.12
  Bottom w0.25: v1(16.002,59.436) 17.584,59.436 32.512,44.508 v1(32.512,27.523)
AUX_OUT_7_5V: J2.16 U2.6 | length 39.1
  Top w0.25: U2.6 40.397,28.639 46.863,28.639 v1(47.434,29.21)
  Bottom w0.25: v1(47.434,29.21) 48.514,28.13 48.514,14.427 56.134,6.807 56.134,5.842 56.896,5.08 58.75,5.08 J2.16
AUX_OUT_7_24V: J9.5 U2.11 | length 78.2
  Top w0.25: J9.5 -19.106,60.762 -16.637,58.293 8.636,58.293 9.017,58.674 v1(16.51,58.674) ; v1(30.861,30.226) 30.861,29.729 31.888,28.702 U2.11
  Bottom w0.25: v1(16.51,58.674) 16.51,58.115 17.094,57.531 18.288,57.531 30.861,44.958 v1(30.861,30.226)
AUX_OUT_8_5V: J2.17 U2.7 | length 40.8
  Top w0.25: U2.7 40.968,30.607 v1(47.625,30.607)
  Bottom w0.25: v1(47.625,30.607) 48.914,29.318 48.914,15.221 52.07,12.065 56.845,12.065 J2.17
AUX_OUT_8_24V: J9.7 U2.10 | length 85.6
  Top w0.25: J9.7 -26.106,58.491 -25.146,57.531 8.89,57.531 9.465,58.106 13.446,58.106 13.453,58.099 17.205,58.099 v1(17.526,58.42) ; v1(31.75,30.353) 31.877,30.353 32.258,29.972 U2.10
  Bottom w0.25: v1(17.526,58.42) 17.965,58.42 31.75,44.635 v1(31.75,30.353)
CHASSIS_GND: C6.1 JP7.1 JP8.1 JP9.1 JP10.2 MH6.1 R4.2 | length 11.1
  Top w0.25: v1(8.255,19.167) v1@8.463,19.167
  Top w0.5: JP10.2 -61.859,10.16 v1(-61.849,10.15) ; R4.2 -45.197,8.362 v1(-46.213,9.378) -44.943,10.648 C6.1 ; v1(-31.877,17.643) -31.867,17.653 JP7.1 ; v1@8.463,19.167 JP8.1 ; JP9.1 66.792,18.669 v1(66.802,18.679)
GND: C1.2 C2.2 C3.1 C4.1 C5.1 C6.2 D1.K D2.K J1.18 J1.19 J1.20 J1.21 J1.22 J1.23 J1.24 J1.25 J2.18 J2.19 J2.20 J2.21 J2.22 J2.23 J2.24 J2.25 J3.18 J3.19 J3.20 J3.21 J3.22 J3.23 J3.24 J3.25 J4.2 J4.7 J4.9 J4.11 J5.2 J5.7 J5.9 J5.11 J6.2 J6.7 J6.9 J6.11 J7.2 J16.2 J17.10 R4.1 R5.1 R6.1 R7.1 R8.1 R9.1 R10.1 TP45.1 U1.8 U2.8 U3.8 | length 24.7
  Top w0.25: v1(-55.107,13.208) R6.1@-55.107,14.986 ; v1(-55.107,17.653) R10.1@-55.107,19.329 ; v1(-55.107,22.236) R9.1@-55.107,23.673 ; v1(-55.107,26.543) R8.1@-55.107,28.016 ; v1(-55.107,30.745) R7.1@-55.107,32.36 ; v1(-55.107,35.179) R5.1@-55.107,36.703
  Top w0.5: C6.2 v1(-39.99,10.648) ; R4.1 v1(-39.99,8.362) ; C3.1 -2.159,54.864 v1(-1.487,54.192) U1.8 ; C4.1 39.866,34.302 40.333,33.835 U2.8 ; U3.8 v1(80.1,18.378) 80.645,18.923 C5.1
  other v1: 40.333,32.893
NetD1_A: D1.A R2.1 | length 3
  Top w0.25: R2.1 -26.162,10.552 D1.A
NetD2_A: D2.A R3.1 | length 3
  Top w0.25: R3.1 -16.129,10.679 D2.A
NetJ1_10: J1.10 TP10.1 | length 2.5
  Bottom w0.25: TP10.1 J1.10
NetJ1_11: J1.11 TP11.1 | length 2.5
  Bottom w0.25: TP11.1 J1.11
NetJ1_12: J1.12 TP12.1 | length 2.5
  Bottom w0.25: TP12.1 J1.12
NetJ1_13: J1.13 TP13.1 | length 2.5
  Bottom w0.25: TP13.1 J1.13
NetJ1_14: J1.14 TP6.1 | length 2.6
  Bottom w0.25: J1.14 6.68,8.839 TP6.1
NetJ1_15: J1.15 TP7.1 | length 2.5
  Bottom w0.25: J1.15 TP7.1
NetJ1_16: J1.16 TP8.1 | length 2.5
  Bottom w0.25: J1.16 TP8.1
NetJ1_17: J1.17 TP9.1 | length 2.5
  Bottom w0.25: J1.17 TP9.1
NetJ2_8: J2.8 TP20.1 | length 2.6
  Bottom w0.25: TP20.1 72.644,3.734 J2.8
NetJ2_9: J2.9 TP21.1 | length 2.6
  Bottom w0.25: TP21.1 75.203,3.753 J2.9
NetJ2_10: J2.10 TP22.1 | length 2.6
  Bottom w0.25: TP22.1 77.762,3.772 J2.10
NetJ2_11: J2.11 TP23.1 | length 2.5
  Bottom w0.25: TP23.1 80.321,3.791 J2.11
NetJ2_12: J2.12 TP24.1 | length 2.5
  Bottom w0.25: TP24.1 J2.12
NetJ2_13: J2.13 TP25.1 | length 2.5
  Bottom w0.25: TP25.1 J2.13
NetJ2_15: J2.15 TP17.1 | length 2.8
  Bottom w0.25: J2.15 TP17.1
NetJ3_10: J3.10 TP38.1 | length 5.2
  Top w0.25: TP38.1 J3.10
NetJ3_11: J3.11 TP39.1 | length 5.2
  Top w0.25: TP39.1 J3.11
NetJ3_12: J3.12 TP41.1 | length 5.1
  Top w0.25: TP41.1 J3.12
NetJ3_13: J3.13 TP42.1 | length 5.1
  Top w0.25: TP42.1 J3.13
NetJ3_15: J3.15 TP26.1 | length 18.8
  Top w0.25: TP26.1 v1(2.159,39.37)
  Bottom w0.25: v1(2.159,39.37) 2.159,49.657 3.128,50.626 3.851,50.626 5.2,51.975 6.255,51.975 J3.15
NetJ4_6: J4.6 R11.2 | length 7.6
  Top w0.25: J4.6 -18.578,38.191 -18.161,38.608 R11.2
NetJ4_8: J4.8 R12.2 | length 7.5
  Top w0.25: J4.8 -20.386,44 R12.2
NetJ4_Z1: J4.M1 J4.M2 JP7.2 | length 7.7
  Top w0.5: JP7.2 -22.352,17.653 J4.M2
NetJ5_6: J5.6 R13.2 | length 7.6
  Top w0.25: J5.6 R13.2
NetJ5_8: J5.8 R14.2 | length 7.6
  Top w0.25: J5.8 R14.2
NetJ5_Z1: J5.M1 J5.M2 JP8.2 | length 7.7
  Top w0.5: JP8.2 12.841,18.528 13.993,17.376 J5.M2
NetJ6_6: J6.6 R15.2 | length 11.9
  Top w0.25: R15.2 47.716,38.481 47.97,38.227 58.257,38.227 J6.6
NetJ6_8: J6.8 R16.2 | length 11.7
  Top w0.25: R16.2 46.79,43.731 J6.8
NetJ6_Z1: J6.M1 J6.M2 JP9.2 | length 8.4
  Top w0.5: J6.M2 59.956,17.376 61.249,18.669 JP9.2
NetJ18_8: J18.8 R1.1 | length 33.1
  Top w0.5: J18.8 -69.771,29.035 -70.612,28.194 -70.612,13.716 -65.024,8.128 R1.1
NetJ18_9: J18.9 J18.Z1 J18.Z2 JP10.1 | length 26.4
  Top w0.5: J18.Z2 -65.405,13.903 -65.405,11.261 JP10.1
  Bottom w1: J18.9 -71.882,27.995 -71.882,20.38 J18.Z2
NetTP27_1: TP27.1 U3.4 | length 5.7
  Top w0.25: TP27.1 71.628,13.716 73.406,15.494 U3.4
NetTP28_1: TP28.1 U3.13 | length 6
  Top w0.25: TP28.1 71.628,28.194 73.406,26.416 U3.13
NetTP30_1: TP30.1 U3.5 | length 5.1
  Top w0.25: TP30.1 74.126,14.944 74.676,15.494 U3.5
NetTP31_1: TP31.1 U3.12 | length 5.5
  Top w0.25: TP31.1 74.126,26.416 74.676,25.866 U3.12
NetTP32_1: TP32.1 U3.6 | length 5.2
  Top w0.25: U3.6 75.946,15.875 76.623,15.198 TP32.1
NetTP33_1: TP33.1 U3.11 | length 5.6
  Top w0.25: U3.11 75.946,27.898 TP33.1
NetTP35_1: TP35.1 U3.7 | length 5.7
  Top w0.25: U3.7 77.216,16.002 79.121,14.097 TP35.1
NetTP36_1: TP36.1 U3.10 | length 6.1
  Top w0.25: U3.10 77.216,25.63 79.121,27.535 TP36.1
X_AUX1: J4.12 TP2.1 | length 6.5
  Top w0.25: TP2.1 J4.12
X_AUX2: J4.13 TP3.1 | length 6.5
  Top w0.25: TP3.1 -29.821,36.806 J4.13
X_AUX3: J4.14 TP4.1 | length 6.5
  Top w0.25: TP4.1 J4.14
X_AUX4: J4.15 TP5.1 | length 6.5
  Top w0.25: TP5.1 -29.917,42.346 J4.15
X_BK+: J4.10 TP1.1 | length 6.5
  Top w0.25: TP1.1 -23.543,28.448 J4.10
X_DIR: J1.2 R12.1 | length 61.5
  Top w0.25: R12.1 -11.419,42.28 v1(-11.303,42.164) ; v1(-6.858,2.413) 8.89,2.413 9.22,2.743 J1.2 J1.2@9.144,3.734
  Bottom w0.25: v1(-11.303,42.164) -10.16,42.164 -6.858,38.862 v1(-6.858,2.413)
X_ENABLE: J1.3 U1.1 | length 57.6
  Top w0.25: U1.1 -1.36,43.307 v1(0.254,43.307) ; v1(0.254,1.778) 10.795,1.778 11.76,2.743 J1.3
  Bottom w0.25: v1(0.254,1.778) -1.36,3.392 -1.36,17.272 0.254,18.886 v1(0.254,43.307)
X_FAR: J18.2 JP2.2 R7.2 | length 28
  Top w0.25: v1(-63.221,32.283) R7.2 -56.907,33.263 -56.642,33.528 -47.117,33.528 -46.736,33.147 JP2.2
  Bottom w0.25: J18.2 -63.639,24.88 -63.221,25.298 v1(-63.221,32.283)
X_N-OT: J4.5 U1.14 | length 22.8
  Top w0.25: J4.5 -11.696,35.421 -9.544,37.573 -9.544,44.685 -8.255,45.974 U1.14
X_NEAR: J18.1 JP1.2 R5.2 | length 35.5
  Top w0.25: J18.1 v1(-59.956,22.11) v1@-59.932,22.11 ; v1(-59.956,36.588) -56.919,36.588 R5.2 -56.907,37.477 -56.538,37.846 -47.117,37.846 -46.736,37.465 JP1.2
  Bottom w0.25: v1(-59.956,22.11) v1(-59.956,36.588) v1@-59.956,36.691
X_NEG_LIMIT: J2.2 JP1.3 JP2.3 U1.3 | length 155.3
  Top w0.25: JP1.3 JP2.3 -37.668,32.08 -27.07,21.482 -0.146,21.482 0.254,21.082 v1(1.524,21.082) 1.67,21.228 29.318,21.228 v1(29.337,21.209) ; U1.3 v1(1.016,45.974) ; v1(29.337,14.986) 29.718,14.605 v1(41.148,14.605)
  Bottom w0.25: v1(1.016,45.974) 1.524,45.466 v1(1.524,21.082) ; v1(29.337,14.986) v1(29.337,21.209) ; v1(41.148,14.605) 41.148,6.223 42.799,4.572 50.927,4.572 53.213,2.286 56.134,2.286 57.48,3.632 J2.2
X_P-OT: J4.4 U1.15 | length 23.4
  Top w0.25: J4.4 -13.323,32.651 -9.017,36.957 -9.017,44.039 -8.352,44.704 U1.15
X_POS_LIMIT: J2.3 JP1.1 JP2.1 U1.2 | length 162.6
  Top w0.25: v1(-41.402,34.29) -38.989,34.29 -26.935,22.236 0.624,22.236 v1(0.889,21.971) 23.724,21.971 23.851,21.844 v1(29.972,21.844) ; U1.2 v1(0.489,44.704) ; v1@29.82,15.875 v1(29.972,15.875) 30.099,15.748 v1(40.333,15.748)
  Bottom w0.25: JP2.1 -49.276,34.036 -49.022,34.29 ; JP1.1 -49.276,34.544 -49.022,34.29 ; v1(-41.402,34.29) -49.022,34.29 ; v1(0.489,44.704) 0.762,44.431 0.762,44.177 0.889,44.05 v1(0.889,21.971) ; v1(29.972,15.875) v1(29.972,21.844) ; v1(40.333,15.748) 40.333,5.768 42.545,3.556 50.546,3.556 52.832,1.27 57.48,1.27 J2.3
X_STEP: J1.1 R11.1 | length 53.5
  Top w0.25: v1(-11.419,36.692) R11.1 ; v1(-11.303,3.302) 6.172,3.302 J1.1
  Bottom w0.25: v1(-11.419,36.692) -11.419,3.418 v1(-11.303,3.302)
Y_AUX1: J5.12 TP15.1 | length 10.1
  Top w0.25: TP15.1 14.224,31.178 14.224,32.281 J5.12
Y_AUX2: J5.13 TP16.1 | length 10.2
  Top w0.25: TP16.1 9.906,29.337 14.224,33.655 14.224,35.051 J5.13
Y_AUX3: J5.14 TP18.1 | length 10.6
  Top w0.25: TP18.1 10.477,32.067 13.335,34.925 13.335,36.932 J5.14
Y_AUX4: J5.15 TP19.1 | length 10.8
  Top w0.25: TP19.1 10.783,34.798 12.573,36.588 12.573,38.94 J5.15
Y_BK+: J5.10 TP14.1 | length 8.2
  Top w0.25: TP14.1 14.272,28.496 J5.10
Y_DIR: J1.5 R14.1 | length 50.5
  Top w0.25: v1(18.034,13.843) v1(25.781,13.843) ; v1(26.035,41.783) 27.94,41.783 28.205,42.048 R14.1
  Bottom w0.25: J1.5 17.018,3.81 18.034,4.826 v1(18.034,13.843) ; v1(25.781,13.843) 25.781,41.529 v1(26.035,41.783) v1@26.035,41.91
Y_ENABLE: J1.6 U2.1 | length 42.2
  Top w0.25: v1(20.574,9.144) 41.91,9.144 v1(42.037,9.271) ; U2.1 41.656,22.352 42.037,21.971 v1(42.037,20.828)
  Bottom w0.25: J1.6 19.939,3.81 20.574,4.445 v1(20.574,9.144) ; v1(42.037,9.271) v1(42.037,20.828)
Y_FAR: J18.4 JP4.2 R9.2 | length 28.2
  Top w0.25: J18.4 v1(-58.166,30.42) ; v1(-58.242,23.698) R9.2 -56.907,24.754 -56.261,25.4 -47.117,25.4 -46.736,25.019 JP4.2
  Bottom w0.25: v1(-58.242,23.698) -58.242,30.344 v1(-58.166,30.42)
Y_N-OT: J5.5 U2.14 | length 21
  Top w0.25: J5.5 20.193,35.421 30.722,24.892 U2.14
Y_NEAR: J18.3 JP3.2 R8.2 | length 21.4
  Top w0.25: J18.3 -64.891,27.991 R8.2 -56.907,28.967 -56.41,29.464 -46.863,29.464 -46.736,29.337 JP3.2
Y_NEG_LIMIT: J2.4 JP3.3 JP4.3 U2.3 | length 143.6
  Top w0.25: JP3.3 JP4.3 -40.65,20.051 -19.084,20.051 -19.08,20.047 2.122,20.047 2.126,20.051 21.928,20.051 25.088,16.891 v1(45.212,16.891) ; U2.3 v1(44.958,24.892) 49.054,24.892 49.435,25.273 v1(49.53,25.273)
  Bottom w0.25: v1(44.958,24.892) 44.958,24.797 45.212,24.543 v1(45.212,16.891) ; v1(49.53,25.273) 49.53,17.468 54.533,12.465 57.011,12.465 61.856,7.62 62.775,7.62 63.61,6.785 63.61,4.86 J2.4
Y_P-OT: J5.4 U2.15 | length 20.4
  Top w0.25: J5.4 20.308,32.651 29.337,23.622 U2.15
Y_POS_LIMIT: J2.5 JP3.1 JP4.1 U2.2 | length 144.8
  Top w0.25: v1(-41.402,25.726) -32.965,25.726 -28.321,21.082 -0.312,21.082 0.323,20.447 1.956,20.447 2.337,20.828 22.293,20.828 25.087,18.034 v1(44.323,18.034) ; U2.2 40.409,23.698 v1(44.323,23.698) v1(50.114,23.698)
  Bottom w0.25: JP4.1 -49.276,25.036 -48.586,25.726 ; JP3.1 -49.276,26.416 -48.586,25.726 ; v1(-41.402,25.726) -48.586,25.726 ; v1(44.323,18.034) v1(44.323,23.698) ; v1(50.114,23.698) 50.114,17.45 54.483,13.081 57.88,13.081 64.05,6.911 64.05,5.915 65.1,4.865 J2.5
Y_STEP: J1.4 R13.1 | length 46.5
  Top w0.25: J1.4 15.621,5.131 15.621,7.874 16.002,8.255 v1(26.924,8.255) ; v1(28.194,36.703) 28.205,36.714 R13.1
  Bottom w0.25: v1(26.924,8.255) 26.924,14.224 28.194,15.494 v1(28.194,36.703)
Z_AUX1: J6.12 TP29.1 | length 6.3
  Top w0.25: TP29.1 J6.12
Z_AUX2: J6.13 TP34.1 | length 6.3
  Top w0.25: TP34.1 49.167,36.806 J6.13
Z_AUX3: J6.14 TP37.1 | length 6.3
  Top w0.25: TP37.1 49.186,39.576 J6.14
Z_AUX4: J6.15 TP40.1 | length 6.3
  Top w0.25: TP40.1 49.204,42.346 J6.15
Z_BOTTOM: J18.6 JP6.2 R6.2 | length 29.5
  Top w0.25: J18.6 -68.072,20.447 -62.738,15.113 R6.2 -56.907,16.267 -56.283,16.891 -47.244,16.891 -46.736,16.383 JP6.2
Z_BRAKE: J6.10 K1.12 | length 124.4
  Top w0.25: v1(-44.069,39.243) -39.516,34.69 -38.823,34.69 -26.769,22.636 -0.478,22.636 -0.313,22.801 v1(24.452,22.801) ; v1(25.019,19.812) 25.146,19.685 51.308,19.685 54.229,22.606 54.229,26.265 55.453,27.489 J6.10
  Bottom w0.25: K1.12 -44.281,39.455 v1(-44.069,39.243) ; v1(24.452,22.801) 24.452,20.379 v1(25.019,19.812)
Z_BRK_NC: J16.3 K1.3 | length 21.1
  Top w1: J16.3 -59.634,49.332 -58.166,50.8 -50.165,50.8 -49.361,51.604 K1.3
Z_BRK_NO: J16.1 K1.5 | length 15
  Top w1: J16.1 -62.555,56.332 -59.309,53.086 K1.5
Z_DIR: J1.8 R16.1 | length 58.9
  Top w0.25: v1(25.654,10.795) 25.781,10.922 v1(42.672,10.922) ; v1(43.434,43.561) R16.1
  Bottom w0.25: J1.8 25.654,5.004 v1(25.654,10.795) ; v1(42.672,10.922) 42.672,42.799 v1(43.434,43.561)
Z_ENABLE: J1.9 U3.1 | length 55.5
  Top w0.25: v1(28.194,13.589) 67.945,13.589 69.596,15.24 U3.1
  Bottom w0.25: J1.9 28.194,5.004 v1(28.194,13.589)
Z_N-OT: J6.5 U3.14 | length 20.5
  Top w0.25: J6.5 62.738,35.421 72.136,26.023 U3.14
Z_NEG_LIMIT: J2.6 JP5.3 JP6.3 U3.3 | length 141.3
  Top w0.25: JP5.3 JP6.3 -41.656,12.573 -3.76,12.573 2.195,18.528 6.952,18.528 9.627,15.853 9.627,12.852 9.973,12.506 68.564,12.506 72.136,16.078 U3.3
  Bottom w0.25: v1(66.421,12.446) 66.421,5.029 J2.6
Z_P-OT: J6.4 U3.15 | length 18.1
  Top w0.25: J6.4 64.25,32.651 70.866,26.035 U3.15
Z_POS_LIMIT: J2.7 JP5.1 JP6.1 U3.2 | length 146
  Top w0.25: v1(-42.037,17.145) -37.865,12.973 -3.926,12.973 2.029,18.928 7.118,18.928 10.027,16.019 10.027,13.976 10.989,13.014 66.176,13.014 66.183,13.021 68.239,13.021 v1@68.287,12.973 ; v1@68.361,13.046 70.866,15.552 U3.2
  Bottom w0.25: JP6.1 -49.276,16.51 -48.641,17.145 ; JP5.1 -49.276,17.78 -48.641,17.145 ; v1(-42.037,17.145) -48.641,17.145 ; v1(68.326,13.081) 68.326,8.173 68.961,7.538 68.961,5.029 J2.7
Z_STEP: J1.7 R15.1 | length 58.1
  Top w0.25: v1(23.114,11.811) 23.428,11.497 v1(44.129,11.497) ; R15.1 44.693,37.222 v1(45.212,36.703)
  Bottom w0.25: J1.7 23.114,5.004 v1(23.114,11.811) v1@23.114,12.065 ; v1(44.129,11.497) 44.129,17.415 43.748,17.796 43.748,35.239 v1(45.212,36.703) v1@45.212,36.957
Z_TOP: J18.5 JP5.2 R10.2 | length 33.9
  Top w0.25: v1(-61.468,19.558) -61.316,19.406 R10.2 -56.907,20.436 -56.515,20.828 -46.736,20.828 JP5.2
  Bottom w0.25: J18.5 -63.15,33.19 -61.468,31.508 v1(-61.468,19.558)
pads on no net: J18.7 K1.8 K1.9 K1.10 MH1.1 MH2.1 MH3.1 MH4.1 MH5.1

## Polygon pours and split planes (outlines as drawn)
GND on GND (split plane): 91.573,52.318 68.58,52.318 68.482,52.309 68.388,52.28 68.301,52.234 68.225,52.171 68.162,52.095 68.116,52.008 68.087,51.914 68.078,51.816 68.078,33.02 68.087,32.922 68.116,32.828 68.162,32.741 68.225,32.665 68.301,32.602 68.388,32.556 68.482,32.527 68.58,32.518 91.573,32.518 91.573,0.502 -75.698,0.502 -75.698,69.348 91.573,69.348
CHASSIS_GND on PWR (split plane): 67.562,14.861 64.516,14.861 64.466,14.852 64.424,14.824 64.396,14.782 64.387,14.732 64.387,9.146 16.383,9.146 16.333,9.137 16.291,9.109 16.263,9.067 16.255,9.027 -6.858,9.027 -6.908,9.017 -6.95,8.989 -6.953,8.983 -6.975,8.979 -7.017,8.951 -8.853,7.114 -62.484,7.114 -62.534,7.105 -62.576,7.077 -62.604,7.035 -62.613,6.985 -62.613,0.502 -75.698,0.502 -75.698,20.064 67.562,20.064
5V on PWR (split plane): 91.573,0.502 -62.355,0.502 -62.355,6.856 -8.8,6.856 -8.75,6.865 -8.708,6.893 -6.834,8.768 16.333,8.768 16.383,8.778 16.425,8.806 16.453,8.848 16.461,8.888 91.573,8.888
24V on PWR (split plane): 91.573,52.318 68.58,52.318 68.482,52.309 68.388,52.28 68.301,52.234 68.225,52.171 68.162,52.095 68.116,52.008 68.087,51.914 68.078,51.816 68.078,33.02 68.087,32.922 68.116,32.828 68.162,32.741 68.225,32.665 68.301,32.602 68.388,32.556 68.482,32.527 68.58,32.518 91.573,32.518 91.573,9.146 64.645,9.146 64.645,14.603 67.691,14.603 67.741,14.612 67.783,14.64 67.811,14.682 67.82,14.732 67.82,20.193 67.811,20.243 67.783,20.285 67.741,20.313 67.691,20.322 -75.698,20.322 -75.698,69.348 91.573,69.348

## Other copper
PWR (plane layer: these items are gaps in the copper):
  lines w0.254: -76.2,20.193 -22.479,20.193 53.975,20.193 67.691,20.193 67.691,14.732 64.516,14.732 64.516,9.017 ; -62.484,0.127 -62.484,6.985 -8.8,6.985 -6.925,8.859 ; -6.858,8.897 16.333,8.897 ; 16.383,9.017 92.075,9.017

## Silkscreen, mask and mechanical layers (free items; w line width, h text height)
Top Overlay:
  lines w0.254: -68.312,3.013 -67.675,2.375 -64.7,2.375
  text "Pos Limit" at -48.768,38.481 h2.5 r90
  text "Neg Limit" at -43.434,38.481 h2.5 r90
  text "Chassis Ground / Connection" at -64.125,1.3 h2.5
M7 - Board Outline:
  the board outline again, w0.1

## Dimensions
-71.12,6.35 to -76.504,0 on M11 - Dimensions
86.995,13.97 to 92.075,0 on M11 - Dimensions
86.995,64.77 to 86.995,13.97 on M11 - Dimensions
86.995,64.77 to 92.379,69.85 on M11 - Dimensions
-71.12,64.77 to -71.12,6.35 on M11 - Dimensions
5.08,64.77 to -71.12,64.77 on M11 - Dimensions
86.995,64.77 to 5.08,64.77 on M11 - Dimensions
92.075,69.85 to 86.995,64.77 on M11 - Dimensions
92.379,51.816 to 92.075,69.85 on M11 - Dimensions
92.379,33.02 to 92.075,51.816 on M11 - Dimensions
92.075,33.02 to 68.58,33.02 on M11 - Dimensions
92.075,0 to 92.075,33.02 on M11 - Dimensions
-76.2,0 to -76.2,69.85 on M11 - Dimensions
92.075,-0.304 to -76.2,0 on M11 - Dimensions

## Text inside footprints (layer, text, board x,y; h text height)
C1: Top Overlay "+" at 32.526,48.526 h1.5
C2: Top Overlay "+" at 49.679,8.878 h1.5 r180
J4: Top Overlay "15" at -23.975,45.036 h1.02 r270
J5: Top Overlay "15" at 15.499,45.036 h1.02 r270
J6: Top Overlay "15" at 54.973,45.036 h1.02 r270
J18: Top Overlay "9" at -68.652,34.15 h1.27 r270; Top Overlay "1" at -65.902,20.65 h1.27 r270